# Altium PCB PCB1_Layout_Final.PcbDoc (part 2 of 2)
Units mm, origin at the board's own origin, x right, y up, seen from the top; angles counter-clockwise.
Board outline 31.5 x 45 mm, 4 copper layers (Top Layer, Ground, Power, Bottom Layer), stack 0.641 mm thick; 56 components, 34 nets, 168 pads, 132 vias.
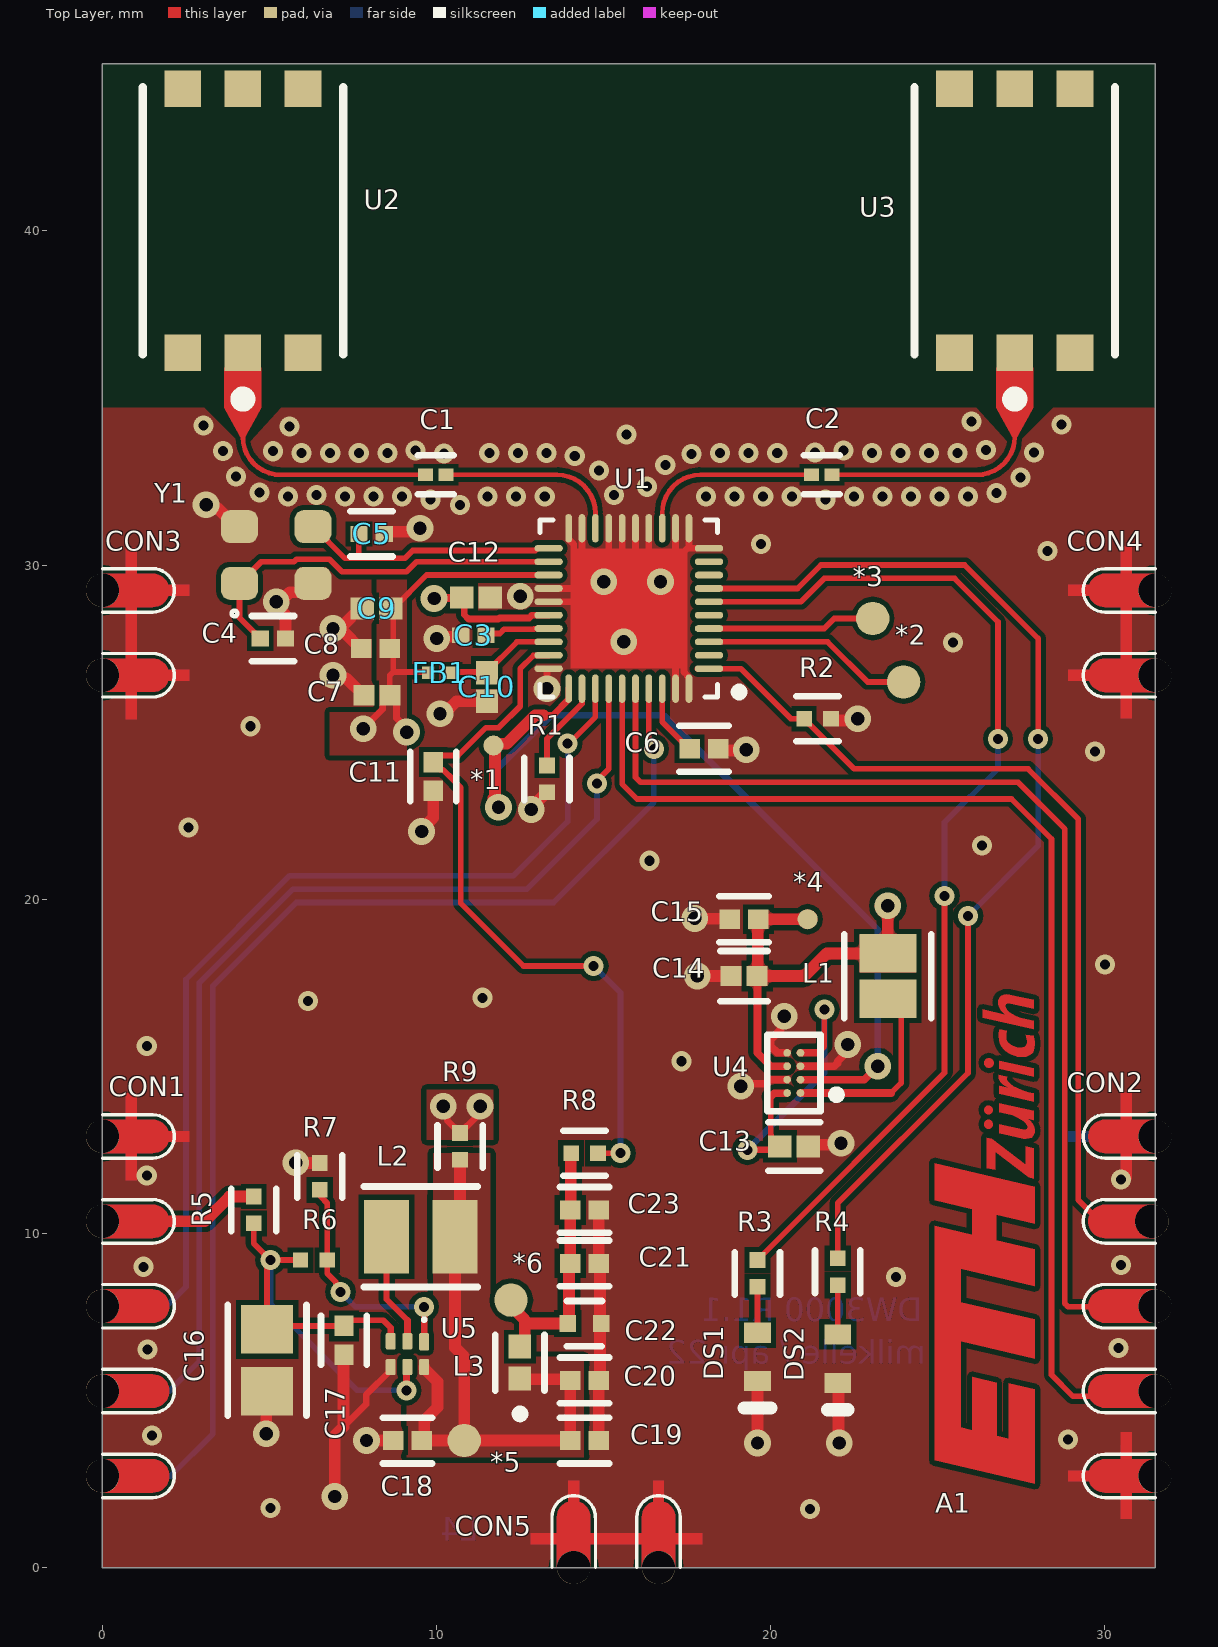
[diagram p0: Top Layer view]

## Other copper (continued)
Power (plane layer: these items are gaps in the copper): (continued)
  text "L3" at 7.67,0.87 h0.7

## Text inside footprints (layer, text, board x,y; h text height)
U2: Mechanical 1 "50Ohm Input" at 2.295,34.966 h0.8; Mechanical 1 "Ground" at 1.406,33.315 h2
U3: Mechanical 1 "50Ohm Input" at 25.395,34.966 h0.8; Mechanical 1 "Ground" at 24.506,33.315 h2